# Altium PCB PCB3.PcbDoc
Units mm, origin at the board's own origin, x right, y up, seen from the top; angles counter-clockwise.
Board outline 152.4 x 101.6 mm, 2 copper layers (Top Layer, Bottom Layer); 9 components, 11 nets, 56 pads, 0 vias.
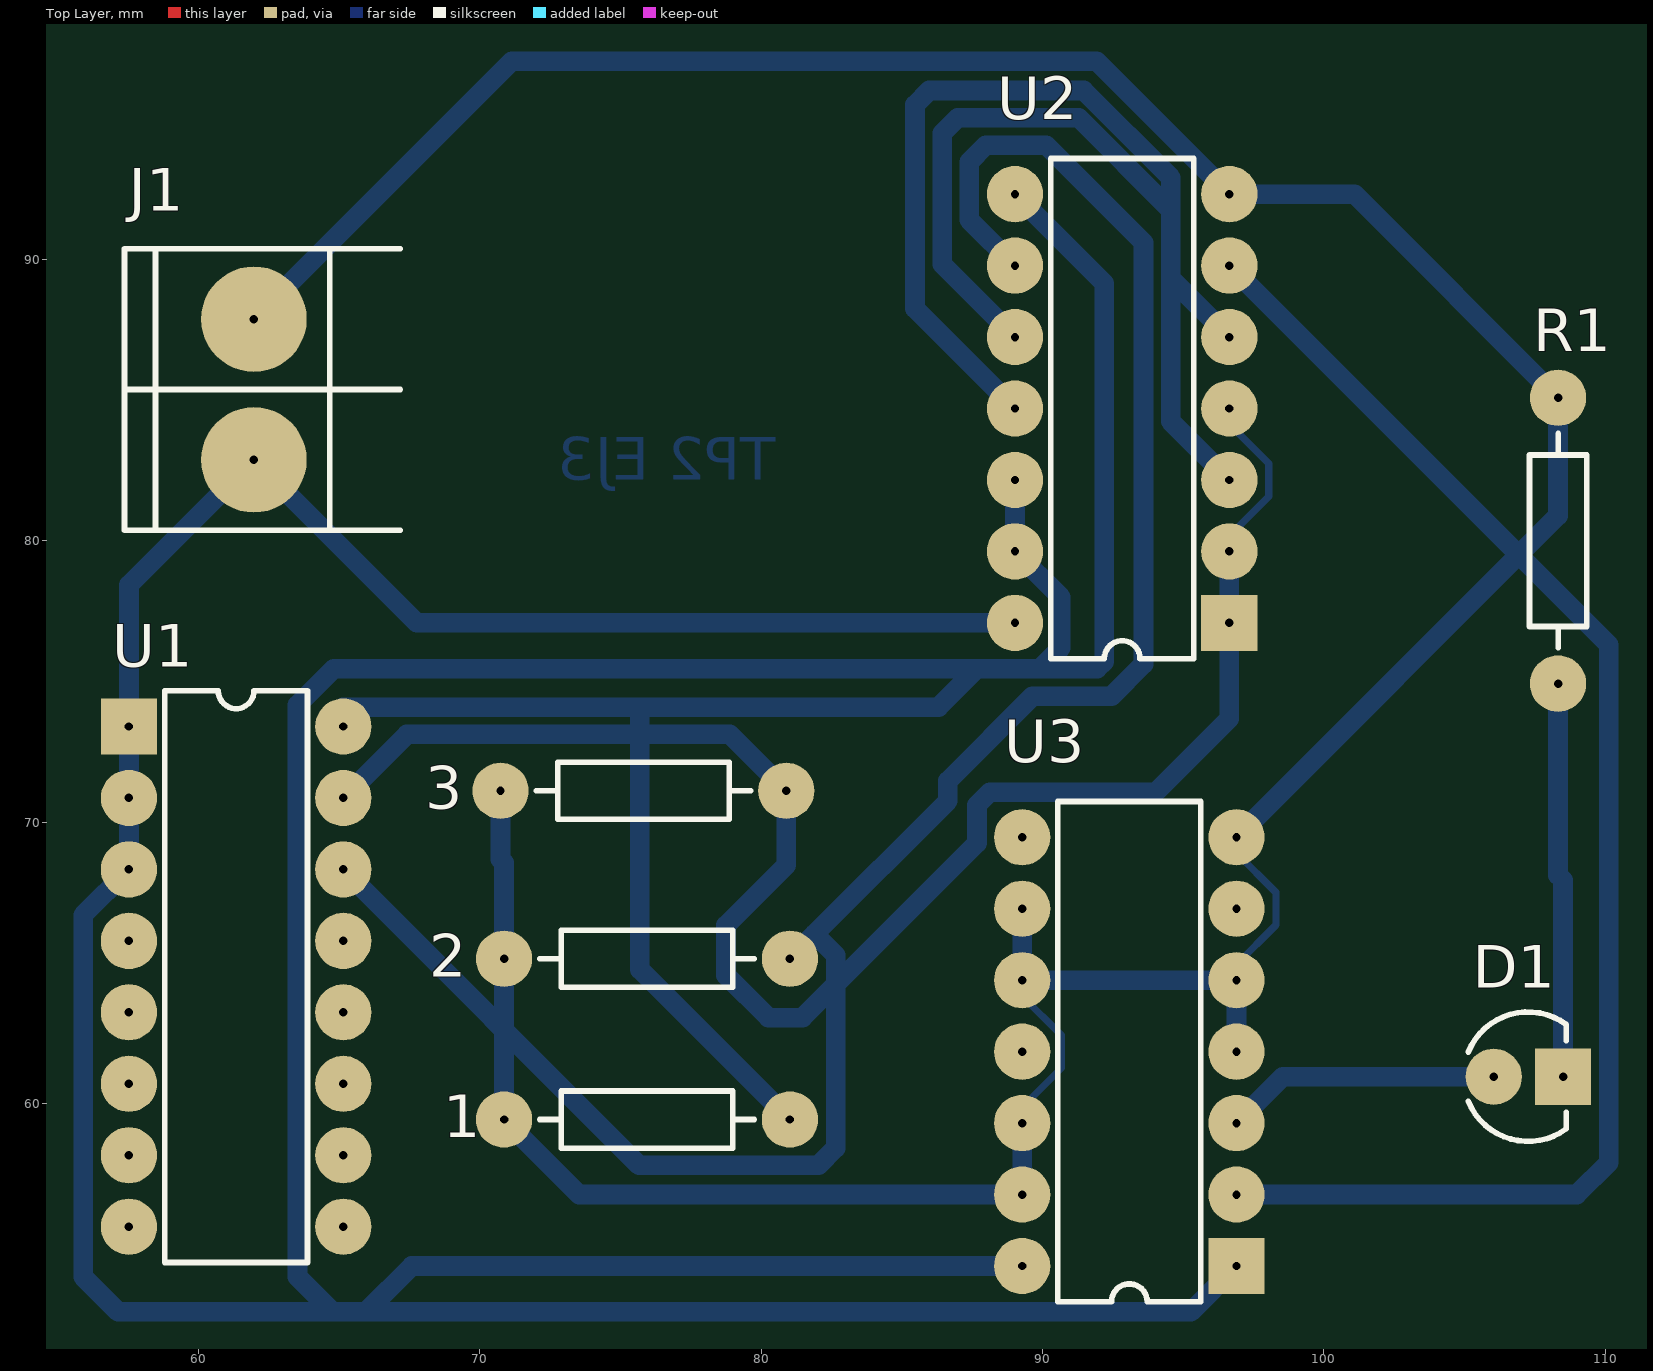
[diagram p0: Top Layer view]
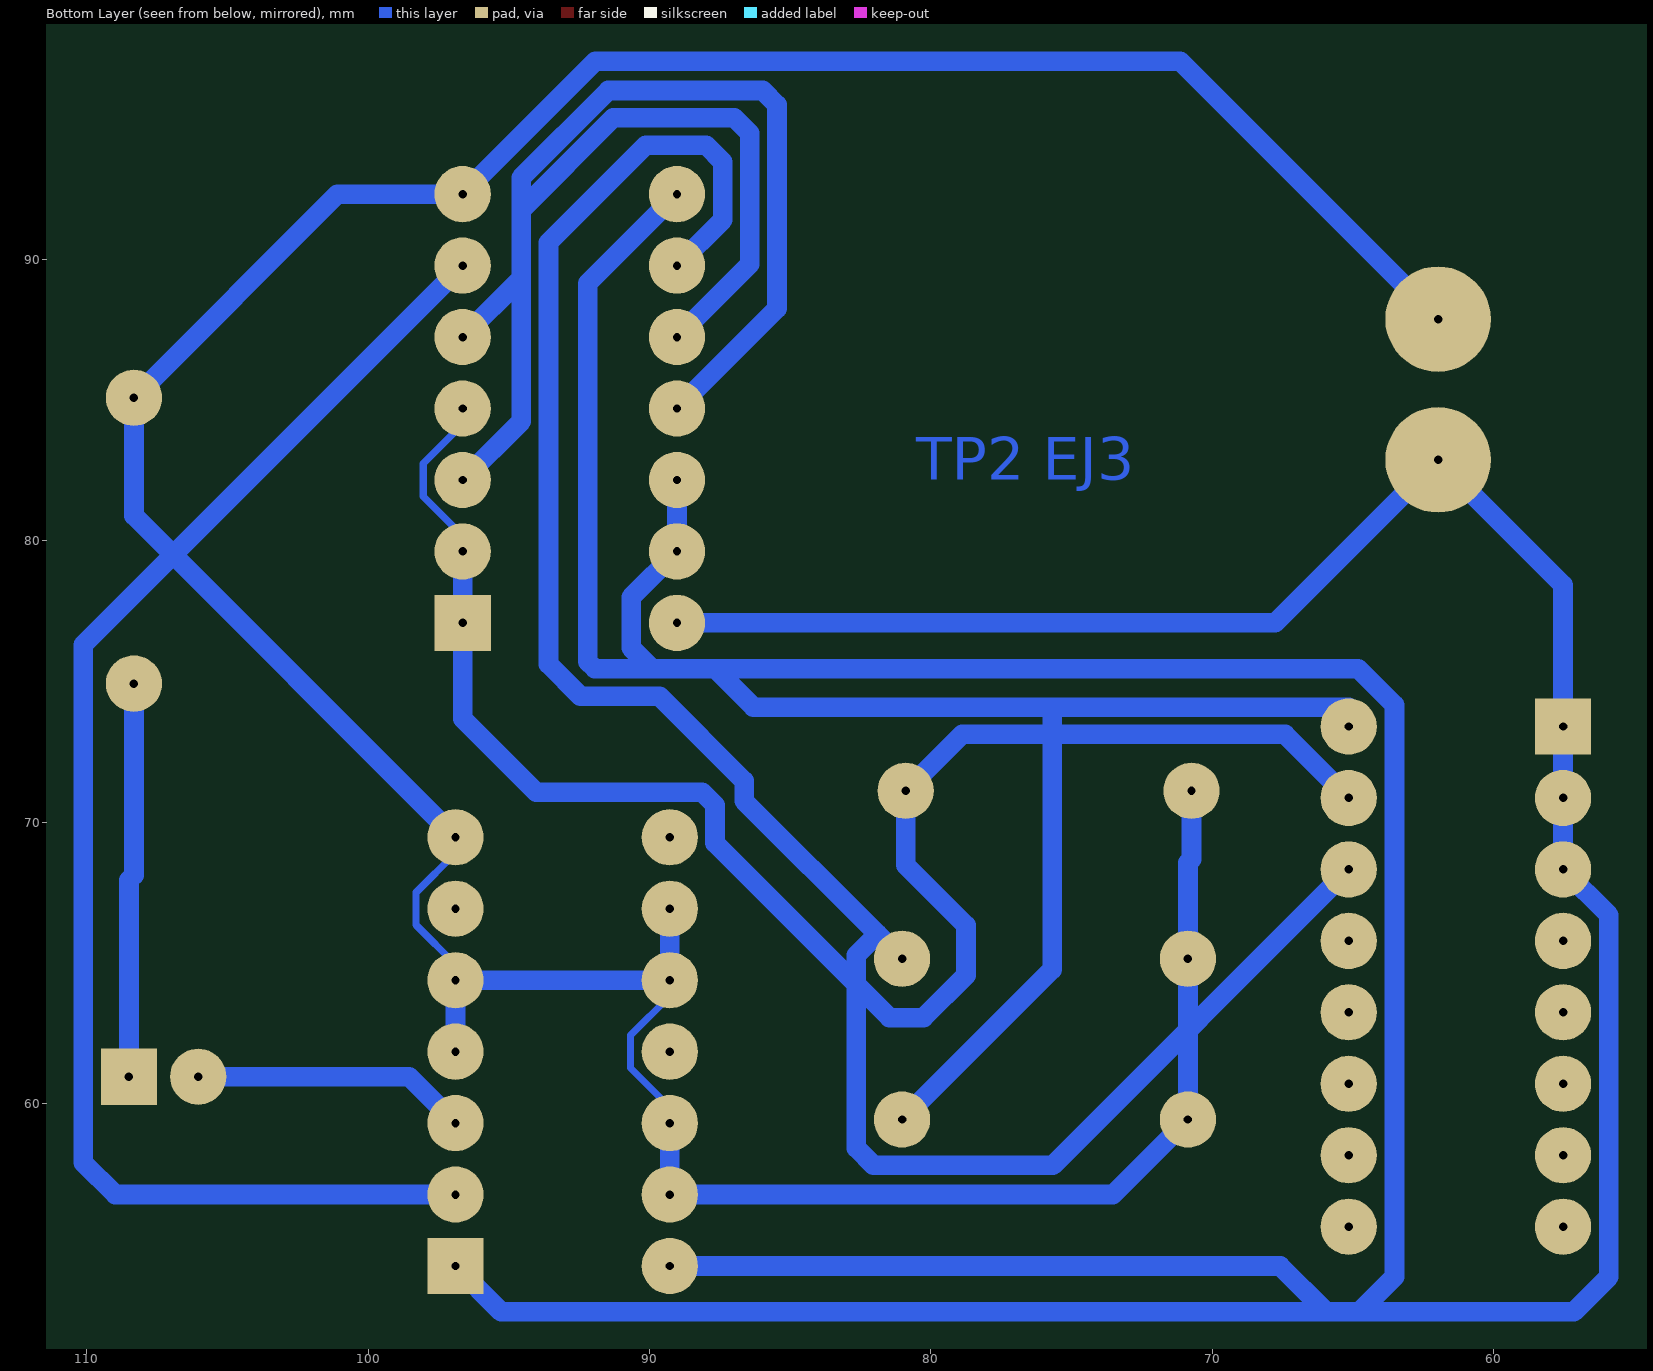
[diagram p1: Bottom Layer view, seen from below]
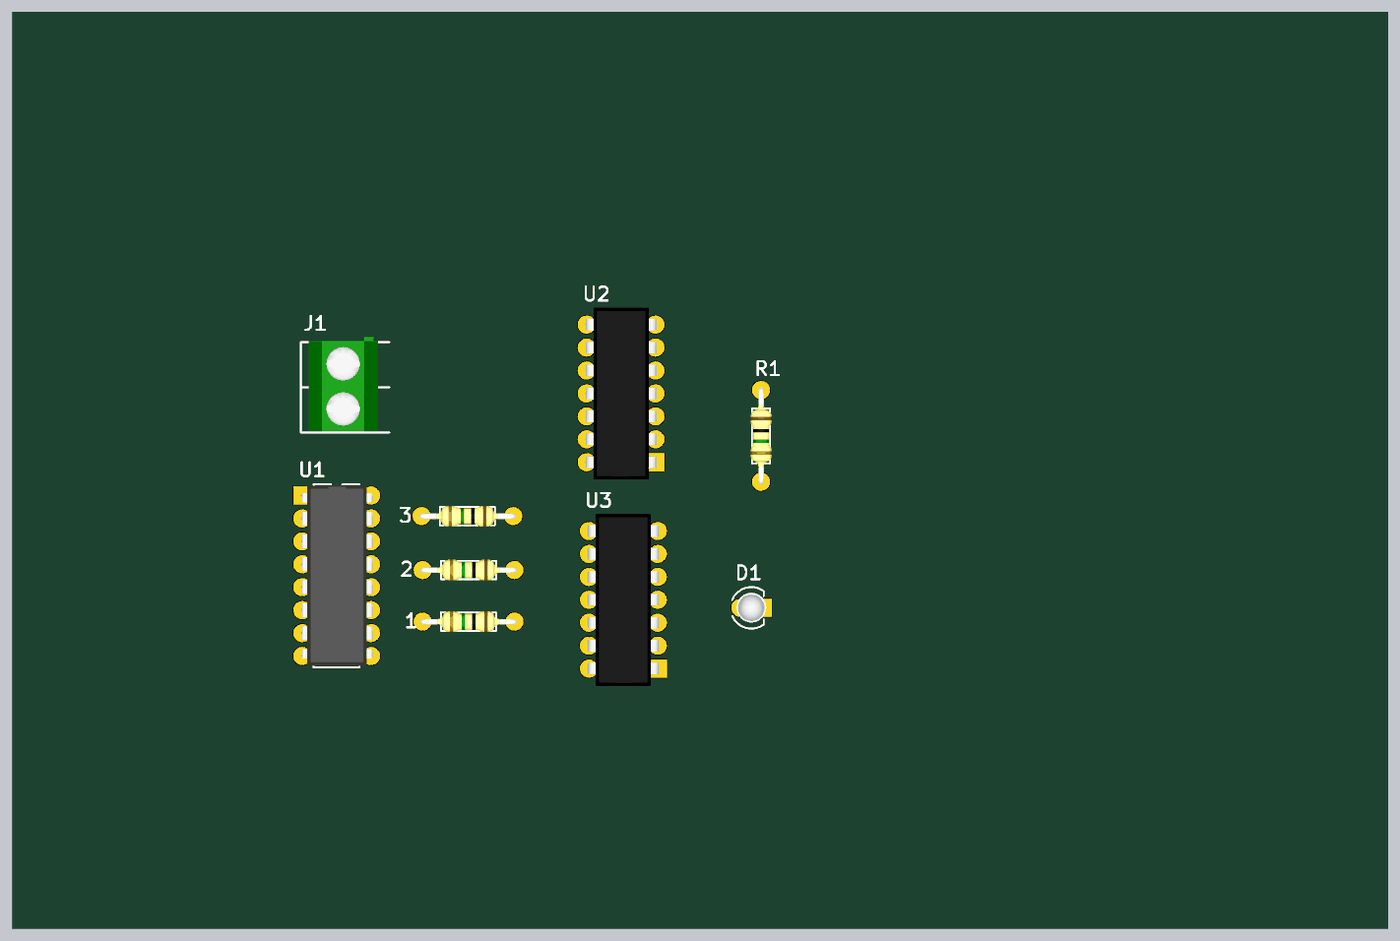
[diagram p2: 3D render of the assembled board from above, using the file's embedded part models]

## Layer stack, top to bottom
Top Solder: solder mask 0.0102, Solder Resist, Dk 3.5
Top Layer: signal copper 0.0356
Dielectric 1: dielectric 0.32, FR-4, Dk 4.8
Bottom Layer: signal copper 0.0356
Bottom Solder: solder mask 0.0102, Solder Resist, Dk 3.5

## Board outline
25.4,25.4 177.8,25.4 177.8,127 25.4,127

## Design rules (kind name [scope] priority, off if disabled: settings)
Clearance [All] p1: gap=0.254 ignorepadtopadclearanceinfootprint=FALSE except(0: Arc-Hole Track-Hole SMDPad-Hole THPad-Hole Via-Hole Fill-Hole Poly-Hole Region-Hole Text-Hole)
PolygonConnect [All] p1: connectstyle=Relief reliefconductorwidth=0.254 reliefentries=4 polygonreliefangle="90 Angle" airgapwidth=0.254
RoomDefinition Sheet1 [InComponentClass('Sheet1')] p1: confinementstyle=ConfineIn formatcopy=TRUE lockcomponents=FALSE outline 0,0 50.8,0 50.8,25.4 0,25.4
RoutingLayers [All] p1: top layer_v5=FALSE bottom layer_v5=TRUE
RoutingVias [All] p1: holewidth=0.711 width=1.27 viastyle="Through Hole" minholewidth=0.711 minwidth=1.27 maxholewidth=0.711 maxwidth=1.27
SolderMaskExpansion [All] p1: expansion=0.102
Width [All] p1: maxlimit=0.7 minlimit=0.254 preferedwidth=0.7 toplayer_maxwidth=0.254 toplayer_prefwidth=0.254 bottomlayer_minwidth=0.7 minimp=50.000000 maximp=50.000000 favimp=50.000000
29 further rules are at their usual default settings.

## Components (designator, comment, footprint, x,y, rotation, side; value= is the part's Value field where it differs from the comment)
1 "10K" RES400 81.026,59.436 r180 top
2 "10K" RES400 81.026,65.151 r180 top
3 "10K" RES400 80.899,71.12 r180 top
D1 "LED" LED3 107.264,60.96 r0 top
J1 "BORNERA 2" BORNERA2 61.976,85.384 r0 top
R1 "RES" RES400 108.331,85.09 r270 top
U1 "IC_DIP16" DIP16 57.531,73.406 r0 top
U2 "IC_DIP14" DIP14 96.647,77.089 r180 top
U3 "IC_DIP14" DIP14 96.901,54.229 r180 top

## Footprints (in the part's own frame and the unit in brackets; to place one, negate y for a bottom-side part, rotate by r counter-clockwise, add the part's x,y. Pads: shape width x height; smd on the part's side, far side on the other; paste and mask are expansions set on the pad)
BORNERA2 [mm] "Bornera con Tornillos 5mm separación"
  round 3.75 hole 0.3: 1(0,2.5) 2(0,-2.5)
  silkscreen extent -4.6,-5 5.2,5, body extent -3.76,-4.89 3.94,5.61, height 10
DIP14 [mm]
  rect 2x2 hole 0.3: 1(0,0)
  round 2 hole 0.3: 2(0,-2.54) 3(0,-5.08) 4(0,-7.62) 5(0,-10.16) 6(0,-12.7) 7(0,-15.24) 8(7.62,-15.24) 9(7.62,-12.7) 10(7.62,-10.16) 11(7.62,-7.62) 12(7.62,-5.08) 13(7.62,-2.54) 14(7.62,0)
  silkscreen extent 1.27,-16.51 6.35,1.27, body extent -0.13,-17.14 7.75,1.9, height 4.19
DIP16 [mm]
  rect 2x2 hole 0.3: 1(0,0)
  round 2 hole 0.3: 2(0,-2.54) 3(0,-5.08) 4(0,-7.62) 5(0,-10.16) 6(0,-12.7) 7(0,-15.24) 8(0,-17.78) 9(7.62,-17.78) 10(7.62,-15.24) 11(7.62,-12.7) 12(7.62,-10.16) 13(7.62,-7.62) 14(7.62,-5.08) 15(7.62,-2.54) 16(7.62,0)
  silkscreen extent 1.27,-19.05 6.35,1.27, body extent -0.08,-18.89 7.79,1.11, height 1.98
LED3 [mm]
  round 2 hole 0.3: 1(-1.219,0)
  rect 2x2 hole 0.3: 2(1.245,0)
  silkscreen extent -2.13,-2.3 1.36,2.3, body extent -1.65,-1.63 1.65,1.66, height 0.49
RES400 [mm]
  round 2 hole 0.3: 1(0,0) 2(10.16,0)
  silkscreen extent 1.27,-1.02 8.89,1.02, body extent -0.3,-1.14 10.46,1.17, height 2.43

## Part data
1 2 3: library part RES

## Nets (pads, with @x,y where several pads share a name; then routed paths per layer and width w, separated by ;. In a path a pad name is that pad's centre, name@x,y a point inside that pad or via, vN(x,y) a via of type N, cw(c..) or ccw(c..) an arc to the next point about the centre after c; other vN are vias at no path point)
A: 1.1 U1.16 U2.12 U2.13 | length 50.6
  Bottom Layer w0.7: U1.16 65.151,74.092 75.692,74.092 ; 1.1 75.692,64.77 75.692,74.092 ; U2.12 U2.13 90.653,78.003 90.653,76.2 89.916,75.463 87.681,75.463 86.309,74.092 75.692,74.092
B: 3.1 U1.15 U2.1 U2.2 U2.4 | length 60.9
  Bottom Layer w0.254: U2.2 96.647,80.188 98.044,81.585 98.044,82.753 96.647,84.15 U2.4
  Bottom Layer w0.7: U1.15 67.412,73.127 78.892,73.127 3.1 80.899,68.481 78.755,66.338 78.755,64.565 80.264,63.056 81.471,63.056 87.677,69.262 87.677,70.612 88.138,71.073 94.035,71.073 96.647,73.685 U2.1 U2.2
C: 2.1 U1.14 U2.9 | length 74.6
  Bottom Layer w0.7: U1.14 75.667,57.81 82.042,57.81 82.652,58.42 82.652,65.278 81.902,66.027 ; 2.1 81.902,66.027 ; U2.9 87.401,91.415 87.401,93.472 87.998,94.068 90.132,94.068 93.596,90.605 93.596,75.622 92.456,74.482 89.648,74.482 86.64,71.474 86.64,70.765 81.902,66.027
GND: 1.2 2.2 3.2 J1.1 R1.1 U2.7 U3.4 U3.5 U3.7 U3.9 U3.10 U3.12 U3.13 | length 134.4
  Bottom Layer w0.254: U3.12 89.281,59.868 90.678,61.265 90.678,62.433 89.281,63.83 U3.10 ; U3.5 96.901,64.948 98.298,66.345 98.298,67.513 96.901,68.91 U3.7
  Bottom Layer w0.7: J1.1 71.147,97.055 91.921,97.055 U2.7 101.092,92.329 R1.1 108.331,80.899 U3.7 ; 3.2 70.739,68.689 70.866,68.562 2.2 1.2 73.533,56.769 U3.13 U3.12 ; U3.9 U3.10 U3.5 U3.4
NetD1_1: D1.1 U3.3 | length 9.8
  Bottom Layer w0.7: U3.3 98.552,60.96 D1.1
NetD1_2: D1.2 R1.2 | length 14
  Bottom Layer w0.7: R1.2 108.331,68.123 108.509,67.945 D1.2
NetU2_3: U2.3 U2.10 | length 28.5
  Bottom Layer w0.7: U2.10 86.436,89.84 86.436,94.488 86.995,95.047 91.288,95.047 94.564,91.77 94.564,84.252 U2.3
NetU2_6: U2.6 U3.2 | length 51.2
  Bottom Layer w0.7: U2.6 110.134,76.302 110.134,57.912 108.991,56.769 U3.2
VCC: J1.2 U1.1 U1.2 U1.3 U2.14 U3.14 | length 95.6
  Bottom Layer w0.7: U2.14 67.771,77.089 J1.2 57.531,78.439 U1.1 U1.2 U1.3 55.905,66.7 55.905,53.848 57.15,52.603 65.964,52.603 67.589,54.229 U3.14
~A: U2.5 U2.11 | length 29.4
  Bottom Layer w0.7: U2.11 85.471,88.265 85.471,95.504 85.979,96.012 91.465,96.012 94.564,92.913 94.564,89.332 U2.5
"~B nand C": U2.8 U3.1 | length 102.1
  Bottom Layer w0.7: U2.8 92.202,89.154 92.202,75.717 91.948,75.463 64.821,75.463 63.525,74.168 63.525,53.848 64.77,52.603 95.275,52.603 U3.1
pads on no net: U1.4 U1.5 U1.6 U1.7 U1.8 U1.9 U1.10 U1.11 U1.12 U1.13 U3.6 U3.8 U3.11

## Other copper
Bottom Layer:
  text "TP2 EJ3" at 80.518,82.169 h1.52